# Altium PCB Z7_Lite.PcbDoc
Units mm, origin at the board's own origin, x right, y up, seen from the top; angles counter-clockwise.
Board outline 100 x 81 mm, 2 copper layers (Top Layer, Bottom Layer), stack 1.571 mm thick; 10 components, 66 nets, 221 pads, 192 vias.
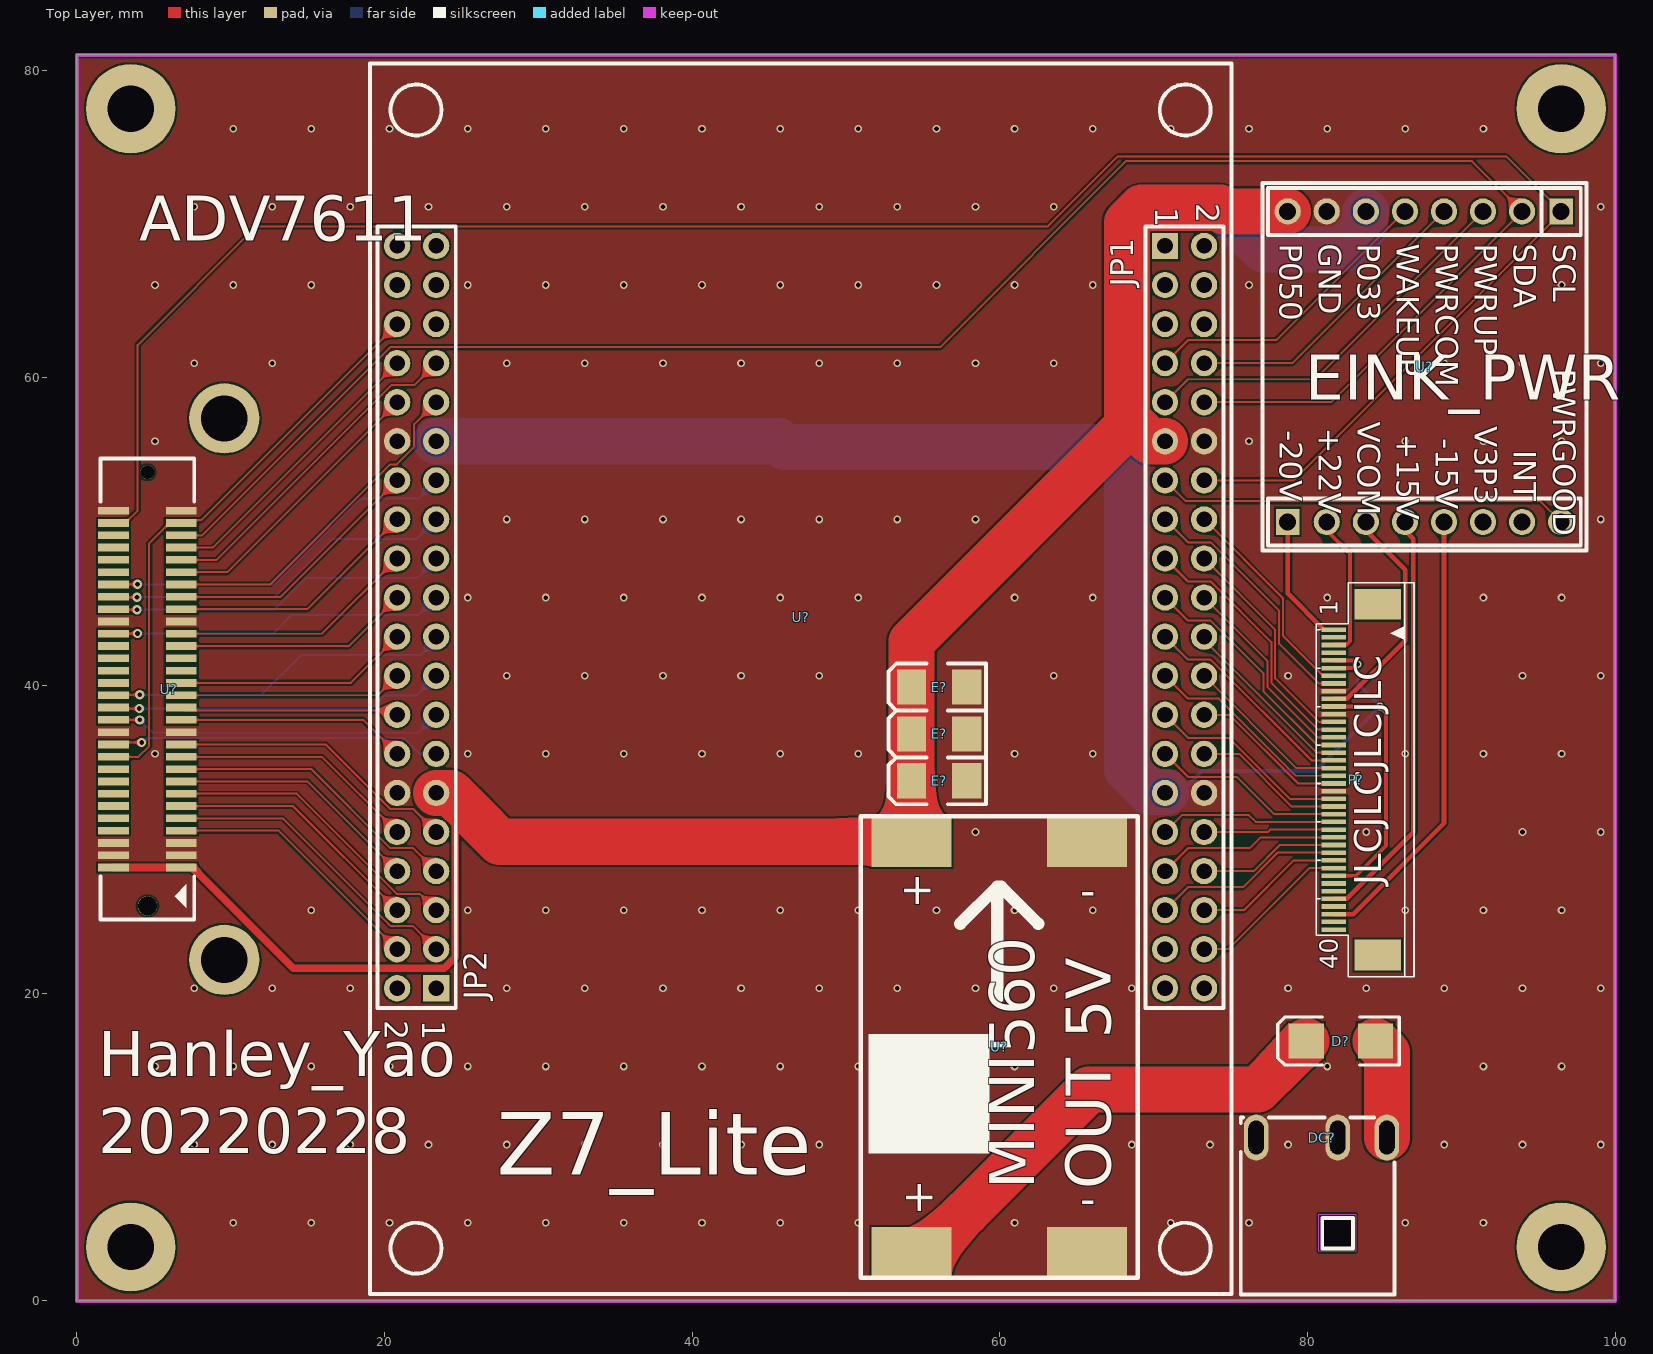
[diagram p0: Top Layer view]
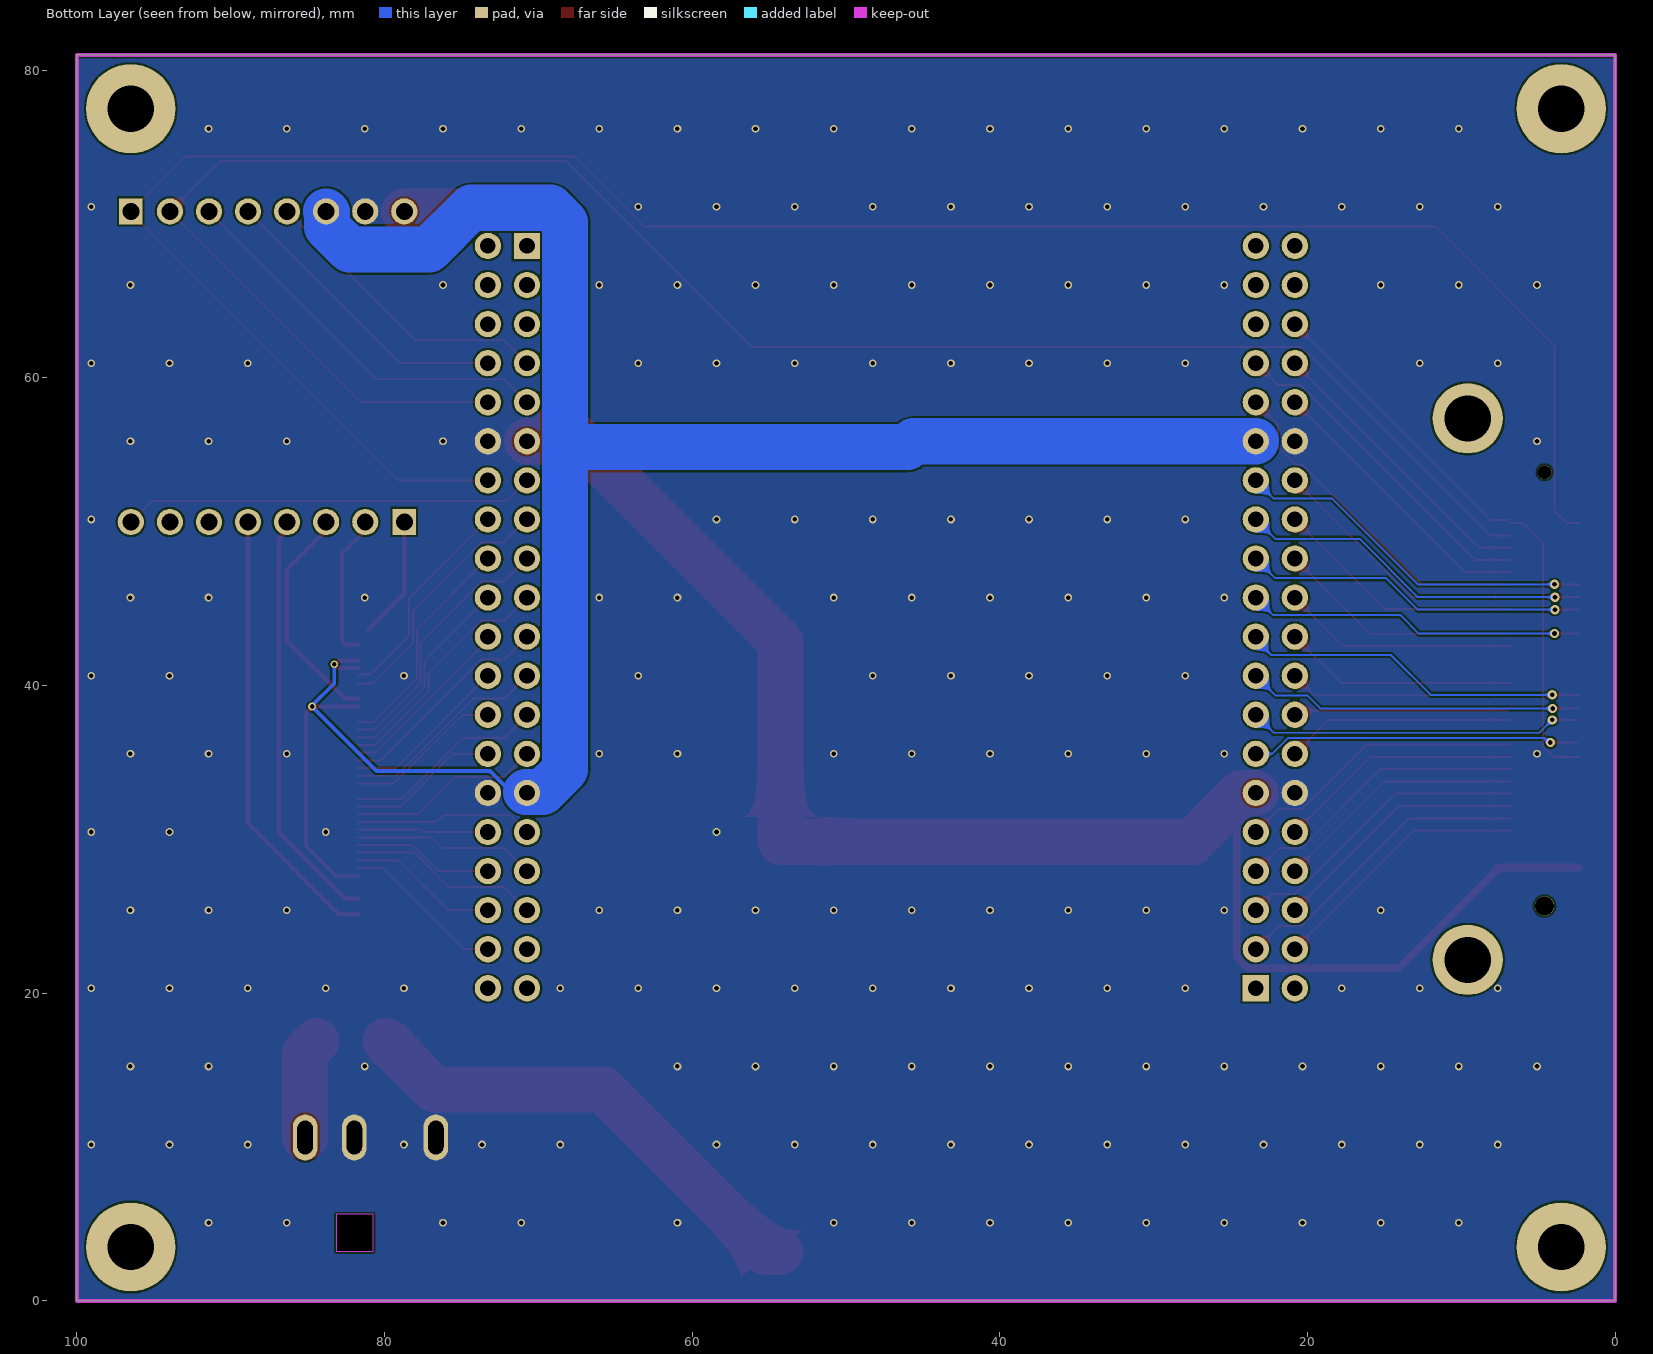
[diagram p1: Bottom Layer view, seen from below]

## Layer stack, top to bottom
Top Solder: solder mask 0.0102, Solder Resist, Dk 3.5
Top Layer: signal copper 0.0356
Dielectric 1: dielectric 1.5, c, Dk 4.8
Bottom Layer: signal copper 0.0356
Bottom Solder: solder mask 0.0102, Solder Resist, Dk 3.5

## Board outline
0,0 100,0 100,81 0,81

## Design rules (kind name [scope] priority, off if disabled: settings)
Clearance ADDR [InNetClass('ADDR') vs InNetClass('ADDR')] p1: gap=0.254 ignorepadtopadclearanceinfootprint=TRUE
Clearance [All] p2: gap=0.127 ignorepadtopadclearanceinfootprint=FALSE
ComponentClearance [All] p1: gap=0.254 collisioncheckmode=3 verticalgap=0.254 showdistances=FALSE donotcheckwithout3dbody=TRUE
HoleSize [All] p1: absolutevalues=TRUE maxlimit=10 minlimit=0.025 maxpercent=80.000 minpercent=20.000
MinimumSolderMaskSliver [All] p1: minsoldermaskwidth=0.127
PlaneConnect [All] p1: planeconnectstyle=Direct reliefexpansion=0.508 reliefentries=4 reliefconductorwidth=0.254 reliefairgap=0.254
PolygonConnect [All] p1: connectstyle=Direct reliefconductorwidth=0.254 reliefentries=4 polygonreliefangle="90 Angle" airgapwidth=0.254
RoutingVias [All] p1: holewidth=0.3 width=0.6 viastyle="Through Hole" minholewidth=0.3 minwidth=0.5 maxholewidth=6.3 maxwidth=6.5
SilkToSilkClearance [All] p1: silktosilkclearance=0.1
SilkToSolderMaskClearance [IsPad] p1: minsilkscreentomaskgap=0 clearancetoexposedcopper=TRUE
SolderMaskExpansion [All] p1: expansion=0.01 istentingtop=FALSE
UnRoutedNet [All] p1: checkbadconnections=TRUE
Width [All] p1: maxlimit=20 minlimit=0.127 preferedwidth=0.254
23 further rules are at their usual default settings.

## Classes and differential pairs
component class Z7_Lite: D? DC? E? P? U?

## Components (designator, comment, footprint, x,y, rotation, side; value= is the part's Value field where it differs from the comment)
D? "SS510" SMB 82.169,16.891 r180 top
DC? "DC-044-20A" DC-IN-TH_DC-044-20A 80.899,6.223 r0 top
E? "10uF/6.3V" C_3528 56.058,33.807 r0 top
E? "10uF/6.3V" C_3528 56.058,39.903 r0 top
E? "10uF/6.3V" C_3528 56.058,36.855 r0 top
P? "FPCCONNECTOR 40PIN 0.5MM" FPC-SMD_40P-P0.50_FG-H2.0-40P 83.744,33.884 r90 top
U? "TPS65185_MOD" TPS65185_MOD 87.605,60.731 r270 top
U? "FEP-HDMI7611-3V3" CONN-SMD_5177983-2 6.625,39.769 r90 top
U? "MINI560" MINI560 59.959,16.51 r90 top
U? "Z7_LITE" Z7_LITE 47.049,40.445 r0 top locked

## Footprints (in the part's own frame and the unit in brackets; to place one, negate y for a bottom-side part, rotate by r counter-clockwise, add the part's x,y. Pads: shape width x height; smd on the part's side, far side on the other; paste and mask are expansions set on the pad)
C_3528 [mil] "B型贴片钽电容 长3.5mm，宽2.8mm，厚1.9mm      [ PCB学习群514746572 ]"
  rect 75x90 smd: 1(-70.87,-0.01) 2(70.86,-0.01)
  silkscreen extent -130,-60 120,60, body extent -69,-55 69,55, height 76
CONN-SMD_5177983-2 [mm]
  rect 0.5x2 smd: 1(-11.599,-0.157) 2(-11.599,4.243) 3(-10.799,-0.157) 4(-10.799,4.243) 5(-10,-0.157) 6(-10,4.243) 7(-9.199,-0.157) 8(-9.199,4.243) 9(-8.4,-0.157) 10(-8.4,4.243) 11(-7.6,-0.157) 12(-7.6,4.243) 13(-6.799,-0.157) 14(-6.799,4.243) 15(-6,-0.157) 16(-6,4.243) 17(-5.199,-0.157) 18(-5.199,4.243) 19(-4.4,-0.157) 20(-4.4,4.243) 21(-3.6,-0.157) 22(-3.6,4.243) 23(-2.799,-0.157) 24(-2.799,4.243) 25(-2,-0.157) 26(-2,4.243) 27(-1.199,-0.157) 28(-1.199,4.243) 29(-0.4,-0.157) 30(-0.4,4.243) 31(0.4,-0.157) 32(0.4,4.243) 33(1.201,-0.157) 34(1.201,4.243) 35(2,-0.157) 36(2,4.243) 37(2.801,-0.157) 38(2.801,4.243) 39(3.6,-0.157) 40(3.6,4.243) 41(4.4,-0.157) 42(4.4,4.243) 43(5.201,-0.157) 44(5.201,4.243) 45(6,-0.157) 46(6,4.243) 47(6.801,-0.157) 48(6.801,4.243) 49(7.6,-0.157) 50(7.6,4.243) 51(8.4,-0.157) 52(8.4,4.243) 53(9.201,-0.157) 54(9.201,4.243) 55(10,-0.157) 56(10,4.243) 57(10.801,-0.157) 58(10.801,4.243) 59(11.6,-0.157) 60(11.6,4.243)
  round 4.57 hole 3: P1(17.6,-2.958) P2(-17.6,-2.958)
  round 1.25 hole 1.25 unplated: ""(-14.099,2.043)
  round 0.9 hole 0.9 unplated: ""(14.1,2.043)
  silkscreen extent -14.99,-1.01 14.99,5.09
DC-IN-TH_DC-044-20A [mm]
  oval 1.6x3 hole 1 slot 2.2 at 90 deg: 1(4.263,4.391) 2(-4.236,4.391) 3(1.064,4.391)
  Keep-Out Layer board cut-out: 2.244,-3.009 -0.156,-3.009 -0.156,-0.609 2.244,-0.609
  silkscreen extent -5.24,-5.81 4.76,5.69
FPC-SMD_40P-P0.50_FG-H2.0-40P [mm]
  rect 0.3x1.6 smd: 1(9.752,2.026) 2(9.252,2.026) 3(8.752,2.026) 4(8.252,2.026) 5(7.752,2.026) 6(7.252,2.026) 7(6.752,2.026) 8(6.252,2.026) 9(5.751,2.026) 10(5.252,2.026) 11(4.752,2.026) 12(4.252,2.026) 13(3.752,2.026) 14(3.252,2.026) 15(2.752,2.026) 16(2.252,2.026) 17(1.752,2.026) 18(1.252,2.026) 19(0.752,2.026) 20(0.252,2.026) 21(-0.248,2.026) 22(-0.748,2.026) 23(-1.248,2.026) 24(-1.748,2.026) 25(-2.248,2.026) 26(-2.748,2.026) 27(-3.248,2.026) 28(-3.748,2.026) 29(-4.248,2.026) 30(-4.748,2.026) 31(-5.248,2.026) 32(-5.748,2.026) 33(-6.248,2.026) 34(-6.748,2.026) 35(-7.248,2.026) 36(-7.748,2.026) 37(-8.248,2.026) 38(-8.748,2.026) 39(-9.248,2.026) 40(-9.748,2.026)
  rect 2x3 smd: 41(-11.398,-0.83) 42(11.398,-0.83)
  silkscreen extent -12.8,-3.18 12.8,3.18
MINI560 [mm]
  rect 3.25x5.2 smd: 1(-13.335,5.7) 2(-13.335,-5.7) 3(13.335,5.7) 4(13.335,-5.7)
  silkscreen extent -15,-9 15,9
SMB [mm] "DO-214-AA/SMB; 2 C-Bend Leads; Body 5.3 x 3.6 mm, inc. leads (LxW)"
  rect 2.3x2.3 smd: 1(-2.25,0) 2(2.25,0)
  silkscreen extent -3.8,-1.55 4.1,1.55
TPS65185_MOD [mm]
  rect 1.7x1.524 hole 1.1: 1(-10.097,8.89) 9(10.097,-8.89)
  round 1.7 hole 1.1: 2(-10.097,6.35) 3(-10.096,3.81) 4(-10.096,1.27) 5(-10.096,-1.27) 6(-10.096,-3.81) 7(-10.096,-6.35) 8(-10.096,-8.89) 10(10.097,-6.35) 11(10.096,-3.81) 12(10.096,-1.27) 13(10.096,1.27) 14(10.096,3.81) 15(10.096,6.35) 16(10.096,8.89)
  silkscreen extent -11.94,-10.54 11.94,10.54
Z7_LITE [mm]
  rect 1.71x1.71 hole 1.01: 1(23.69,28.135) 41(-23.69,-20.125)
  round 1.71 hole 1.01: 2(26.23,28.135) 3(23.69,25.595) 4(26.23,25.595) 5(23.69,23.055) 6(26.23,23.055) 7(23.69,20.515) 8(26.23,20.515) 9(23.69,17.975) 10(26.23,17.975) 11(23.69,15.435) 12(26.23,15.435) 13(23.69,12.895) 14(26.23,12.895) 15(23.69,10.355) 16(26.23,10.355) 17(23.69,7.815) 18(26.23,7.815) 19(23.69,5.275) 20(26.23,5.275) 21(23.69,2.735) 22(26.23,2.735) 23(23.69,0.195) 24(26.23,0.195) 25(23.69,-2.345) 26(26.23,-2.345) 27(23.69,-4.885) 28(26.23,-4.885) 29(23.69,-7.425) 30(26.23,-7.425) 31(23.69,-9.965) 32(26.23,-9.965) 33(23.69,-12.505) 34(26.23,-12.505) 35(23.69,-15.045) 36(26.23,-15.045) 37(23.69,-17.585) 38(26.23,-17.585) 39(23.69,-20.125) 40(26.23,-20.125) 42(-26.23,-20.125) 43(-23.69,-17.585) 44(-26.23,-17.585) 45(-23.69,-15.045) 46(-26.23,-15.045) 47(-23.69,-12.505) 48(-26.23,-12.505) 49(-23.69,-9.965) 50(-26.23,-9.965) 51(-23.69,-7.425) 52(-26.23,-7.425) 53(-23.69,-4.885) 54(-26.23,-4.885) 55(-23.69,-2.345) 56(-26.23,-2.345) 57(-23.69,0.195) 58(-26.23,0.195) 59(-23.69,2.735) 60(-26.23,2.735) 61(-23.69,5.275) 62(-26.23,5.275) 63(-23.69,7.815) 64(-26.23,7.815) 65(-23.69,10.355) 66(-26.23,10.355) 67(-23.69,12.895) 68(-26.23,12.895) 69(-23.69,15.435) 70(-26.23,15.435) 71(-23.69,17.975) 72(-26.23,17.975) 73(-23.69,20.515) 74(-26.23,20.515) 75(-23.69,23.055) 76(-26.23,23.055) 77(-23.69,25.595) 78(-26.23,25.595) 79(-23.69,28.135) 80(-26.23,28.135)
  silkscreen extent -28,-40 28,40

## Part data
D?: "肖特基二极管", 0.0_BOM名称=肖特基二极管, 0.1_属性=100V/5A, 1.库作者=冰凌猫, 2.库版本=v2.0_2021.03.30, 3.交流分享=Q群514746572,开源更新,欢迎一起交流学习PCB设计, 4.作者声明=旨为整合最全库集,欢迎转载,禁止商用！-冰凌猫, 5.备注说明=该库已二次整合过网上各热销库,基本最全,无需重复搜购安装
E? E? E?: library part CT, "贴片钽电容", 0.0_BOM名称=贴片钽电容, 1.库作者=冰凌猫, 2.库版本="v2.0 (2021.03.30)", 3.交流分享=Q群514746572,开源更新,欢迎一起交流学习PCB设计, 4.作者声明=旨为整合最全库集,欢迎转载,禁止商用！-冰凌猫, 5.备注说明=该库已二次整合过网上各热销库,基本最全,无需重复搜购安装

## Free pads (board coordinates)
  round 5.8 hole 3: 3(3.5,3.5) 3(3.5,77.5) 3(96.5,3.5) 3(96.5,77.5)

## Via types
v1: diameter 0.5, hole 0.3, Top Layer to Bottom Layer, tented both sides, 184 vias
v2: diameter 0.6, hole 0.3, Top Layer to Bottom Layer, tented both sides, 8 vias

## Nets (pads, with @x,y where several pads share a name; then routed paths per layer and width w, separated by ;. In a path a pad name is that pad's centre, name@x,y a point inside that pad or via, vN(x,y) a via of type N, cw(c..) or ccw(c..) an arc to the next point about the centre after c; other vN are vias at no path point)
+5: E?.1 U?.1@6.782,28.169 U?.2@2.382,28.169 U?.3@54.259,29.845 U?.8@78.715,70.828 U?.11@70.739,55.88 U?.51@23.359,33.02 | length 127.7
  Top Layer w0.5: U?.2@2.382,28.169 6.782,28.169 7.532,28.169 14.073,21.628 23.869,21.628 24.591,22.35 24.591,31.788 U?.51@23.359,33.02
  Top Layer w3: U?.51@23.359,33.02 24.329,33.02 25.841,31.508 25.841,31.487 27.483,29.845 54.259,29.845 54.259,39.902 54.258,39.903 54.258,42.853 67.897,56.493 ; U?.11@70.739,55.88 69.769,55.88 68.257,57.392 68.257,70.109 69.21,71.062 74.307,71.062 74.541,70.828 U?.8@78.715,70.828
CKV: P?.7 U?.16@73.279,50.8 | length 14.1
  Top Layer w0.127: U?.16@73.279,50.8 78.41,45.669 78.41,43.224 80.912,40.722 81.631,40.722 P?.7
D0: P?.14 U?.17@70.739,48.26 | length 17.1
  Top Layer w0.127: U?.17@70.739,48.26 72.233,46.766 73.712,46.766 77.648,42.83 77.648,40.187 80.699,37.135 P?.14
D1: P?.15 U?.20@73.279,45.72 | length 13.2
  Top Layer w0.127: U?.20@73.279,45.72 77.394,41.605 77.394,39.91 80.668,36.636 P?.15
D2: P?.16 U?.19@70.739,45.72 | length 15.6
  Top Layer w0.127: U?.19@70.739,45.72 72.233,44.226 73.712,44.226 77.14,40.798 77.14,39.623 80.627,36.135 P?.16
D3: P?.17 U?.22@73.279,43.18 | length 11.7
  Top Layer w0.127: U?.22@73.279,43.18 73.279,42.951 80.595,35.636 P?.17
D4: P?.18 U?.21@70.739,43.18 | length 14.3
  Top Layer w0.127: U?.21@70.739,43.18 72.233,41.686 73.712,41.686 80.262,35.135 P?.18
D5: P?.19 U?.24@73.279,40.64 | length 10.9
  Top Layer w0.127: U?.24@73.279,40.64 79.283,34.636 P?.19
D6: P?.20 U?.23@70.739,40.64 | length 13.7
  Top Layer w0.127: U?.23@70.739,40.64 72.233,39.146 74.235,39.146 79.245,34.135 P?.20
D7: P?.21 U?.26@73.279,38.1 | length 10.3
  Top Layer w0.127: U?.26@73.279,38.1 74.921,38.1 79.385,33.636 P?.21
D8: P?.23 U?.25@70.739,38.1 | length 13.2
  Top Layer w0.127: U?.25@70.739,38.1 72.233,36.606 74.88,36.606 78.85,32.636 P?.23
D9: P?.24 U?.28@73.279,35.56 | length 9.9
  Top Layer w0.127: U?.28@73.279,35.56 75.566,35.56 78.991,32.135 P?.24
D10: P?.25 U?.27@70.739,35.56 | length 12.6
  Top Layer w0.127: U?.27@70.739,35.56 72.233,34.066 75.397,34.066 77.827,31.636 P?.25
D11: P?.26 U?.31@70.739,30.48 | length 11.6
  Top Layer w0.127: U?.31@70.739,30.48 71.835,31.576 76.193,31.576 76.633,31.135 P?.26
D12: P?.27 U?.32@73.279,30.48 | length 8.5
  Top Layer w0.127: U?.32@73.279,30.48 77.418,30.48 77.574,30.636 P?.27
D13: P?.28 U?.33@70.739,27.94 | length 11.9
  Top Layer w0.127: U?.33@70.739,27.94 72.233,29.434 76.262,29.434 76.963,30.135 P?.28
D14: P?.29 U?.34@73.279,27.94 | length 9.1
  Top Layer w0.127: U?.34@73.279,27.94 76.496,27.94 78.192,29.636 P?.29
D15: P?.30 U?.35@70.739,25.4 | length 12.5
  Top Layer w0.127: U?.35@70.739,25.4 72.233,26.894 75.81,26.894 78.051,29.135 P?.30
FD0: U?.51@6.782,48.169 U?.73 | length 21.9
  Top Layer w0.127: U?.51@6.782,48.169 9.09,48.169 20.451,59.531 21.93,59.531 U?.73
FD1: U?.49@6.782,47.369 U?.72 | length 18.6
  Top Layer w0.127: U?.49@6.782,47.369 9.768,47.369 U?.72
FD2: U?.47@6.782,46.569 U?.71 | length 22.4
  Top Layer w0.127: U?.47@6.782,46.569 12.57,46.569 20.386,54.386 20.803,54.386 21.93,55.512 21.93,56.991 U?.71
FD3: U?.45@6.782,45.769 U?.68 | length 17.2
  Top Layer w0.127: U?.45@6.782,45.769 13.248,45.769 U?.68
FD4: U?.43@6.782,44.969 U?.66 | length 16.5
  Top Layer w0.127: U?.43@6.782,44.969 14.988,44.969 U?.66
FD5: U?.44@2.382,44.969 U?.63 | length 22.4
  Top Layer w0.127: U?.44@2.382,44.969 2.418,44.933 v2(3.912,44.933)
  Bottom Layer w0.127: v2(3.912,44.933) 12.834,44.933 14.892,46.99 22.089,46.99 U?.63
FD6: U?.40@2.382,43.369 U?.61 | length 22
  Top Layer w0.127: U?.40@2.382,43.369 2.396,43.383 v2(3.937,43.383)
  Bottom Layer w0.127: v2(3.937,43.383) 12.751,43.383 13.945,44.577 22.216,44.577 U?.61
FD7: U?.39@6.782,43.369 U?.64 | length 16.1
  Top Layer w0.127: U?.39@6.782,43.369 15.928,43.369 U?.64
FD8: U?.37@6.782,42.569 U?.62 | length 15.3
  Top Layer w0.127: U?.37@6.782,42.569 17.668,42.569 U?.62
FD9: U?.30@2.382,39.369 U?.59@23.359,43.18 | length 22.7
  Top Layer w0.127: U?.30@2.382,39.369 2.408,39.395 v2(4.089,39.395)
  Bottom Layer w0.127: v2(4.089,39.395) 11.989,39.395 14.58,41.986 22.352,41.986 23.359,42.993 U?.59@23.359,43.18
FD10: U?.31@6.782,40.169 U?.60@20.819,43.18 | length 15.3
  Top Layer w0.127: U?.31@6.782,40.169 17.808,40.169 U?.60@20.819,43.18
FD11: U?.28@2.382,38.569 U?.57@23.359,40.64 | length 21.9
  Top Layer w0.127: U?.28@2.382,38.569 2.444,38.506 v2(4.064,38.506)
  Bottom Layer w0.127: v2(4.064,38.506) 19.152,38.506 19.99,39.345 22.064,39.345 U?.57@23.359,40.64
FD12: U?.26@2.382,37.769 U?.55@23.359,38.1 | length 21.8
  Top Layer w0.127: U?.26@2.383,37.77 v2(4.089,37.77)
  Bottom Layer w0.127: v2(4.089,37.77) 4.928,36.931 22.191,36.931 U?.55@23.359,38.1
FD13: U?.22@2.382,36.169 U?.53@23.359,35.56 | length 21.6
  Top Layer w0.127: U?.22@2.382,36.169 2.513,36.301 v2(4.209,36.301)
  Bottom Layer w0.127: v2(4.209,36.301) 4.322,36.301 4.627,36.606 21.252,36.606 22.298,35.56 U?.53@23.359,35.56
FD14: U?.27@6.782,38.569 U?.56@20.819,38.1 | length 14.2
  Top Layer w0.127: U?.27@6.782,38.569 6.968,38.383 20.536,38.383 U?.56@20.819,38.1
FD15: U?.25@6.782,37.769 U?.54@20.819,35.56 | length 15
  Top Layer w0.127: U?.25@6.782,37.769 18.61,37.769 U?.54@20.819,35.56
FD16: U?.21@6.782,36.169 U?.49@23.359,30.48 | length 18.9
  Top Layer w0.127: U?.21@6.782,36.169 16.18,36.169 20.375,31.974 21.865,31.974 U?.49@23.359,30.48
FD17: U?.19@6.782,35.369 U?.50@20.819,30.48 | length 16.1
  Top Layer w0.127: U?.19@6.782,35.369 15.93,35.369 U?.50@20.819,30.48
FD18: U?.17@6.782,34.569 U?.47@23.359,27.94 | length 19.3
  Top Layer w0.127: U?.17@6.782,34.569 15.251,34.569 20.386,29.434 21.865,29.434 U?.47@23.359,27.94
FD19: U?.15@6.782,33.769 U?.48@20.819,27.94 | length 16.5
  Top Layer w0.127: U?.15@6.782,33.769 14.99,33.769 U?.48@20.819,27.94
FD20: U?.13@6.782,32.969 U?.45@23.359,25.4 | length 19.7
  Top Layer w0.127: U?.13@6.782,32.969 14.3,32.969 20.824,26.446 22.314,26.446 U?.45@23.359,25.4
FD21: U?.11@6.782,32.169 U?.46@20.819,25.4 | length 16.8
  Top Layer w0.127: U?.11@6.782,32.169 14.05,32.169 U?.46@20.819,25.4
FD22: U?.9@6.782,31.369 U?.43@23.359,22.86 | length 20.1
  Top Layer w0.127: U?.9@6.782,31.369 13.372,31.369 20.272,24.469 20.279,24.469 20.393,24.354 21.865,24.354 U?.43@23.359,22.86
FD23: U?.7@6.782,30.569 U?.44@20.819,22.86 | length 17.2
  Top Layer w0.127: U?.7@6.782,30.569 13.11,30.569 U?.44@20.819,22.86
FDE: U?.46@2.382,45.769 U?.65 | length 23.1
  Top Layer w0.127: U?.46@2.382,45.769 2.405,45.745 v2(3.912,45.745)
  Bottom Layer w0.127: v2(3.912,45.745) 12.827,45.745 16.612,49.53 22.089,49.53 U?.65
FHS: U?.53@6.782,48.969 U?.74 | length 19
  Top Layer w0.127: U?.53@6.782,48.969 8.828,48.969 U?.74
FPCLK: U?.29@6.782,39.369 U?.58@20.819,40.64 | length 14.6
  Top Layer w0.127: U?.29@6.782,39.369 19.548,39.369 U?.58@20.819,40.64
FVS: U?.48@2.382,46.569 U?.67 | length 23.8
  Top Layer w0.127: U?.48@2.382,46.569 2.396,46.584 v2(3.937,46.584)
  Bottom Layer w0.127: v2(3.937,46.584) 12.827,46.584 18.415,52.172 22.225,52.172 23.359,53.306 U?.67
GND: DC?.2 DC?.3 E?.2 P?.9 P?.12 P?.22 U?.2@65.659,3.175 U?.3@6.782,28.969 U?.4@2.382,28.969 U?.4@65.659,29.845 U?.5@6.782,29.769 U?.6@2.382,29.769 U?.7@81.255,70.828 U?.12@73.279,55.88 U?.23@6.782,36.969 U?.24@2.382,36.969 U?.30@73.279,33.02 U?.41@6.782,44.169 U?.42@2.382,44.169 U?.52@20.819,33.02 U?.59@6.782,51.369 U?.60@2.382,51.369 U?.70
  other v1: 10.16,5.08 15.24,5.08 20.32,5.08 25.4,5.08 30.48,5.08 35.56,5.08 40.64,5.08 45.72,5.08 50.8,5.08 60.96,5.08 71.12,5.08 76.2,5.08 86.36,5.08 91.44,5.08 7.62,10.16 12.7,10.16 17.78,10.16 22.86,10.16 27.94,10.16 33.02,10.16 38.1,10.16 43.18,10.16 48.26,10.16 53.34,10.16 58.42,10.16 68.58,10.16 73.66,10.16 78.74,10.16 88.9,10.16 93.98,10.16 99.06,10.16 5.08,15.24 10.16,15.24 15.24,15.24 20.32,15.24 25.4,15.24 30.48,15.24 35.56,15.24 40.64,15.24 45.72,15.24 50.8,15.24 55.88,15.24 60.96,15.24 81.28,15.24 91.44,15.24 96.52,15.24 7.62,20.32 12.7,20.32 17.78,20.32 27.94,20.32 33.02,20.32 38.1,20.32 43.18,20.32 48.26,20.32 53.34,20.32 58.42,20.32 63.5,20.32 68.58,20.32 78.74,20.32 83.82,20.32 88.9,20.32 93.98,20.32 99.06,20.32 15.24,25.4 25.4,25.4 30.48,25.4 35.56,25.4 40.64,25.4 45.72,25.4 50.8,25.4 55.88,25.4 60.96,25.4 66.04,25.4 86.36,25.4 91.44,25.4 96.52,25.4 58.42,30.48 83.82,30.48 93.98,30.48 99.06,30.48 5.08,35.56 25.4,35.56 30.48,35.56 35.56,35.56 40.64,35.56 45.72,35.56 50.8,35.56 60.96,35.56 66.04,35.56 86.36,35.56 91.44,35.56 96.52,35.56 27.94,40.64 33.02,40.64 38.1,40.64 43.18,40.64 48.26,40.64 63.5,40.64 78.74,40.64 93.98,40.64 99.06,40.64 25.4,45.72 30.48,45.72 35.56,45.72 40.64,45.72 45.72,45.72 50.8,45.72 60.96,45.72 66.04,45.72 81.28,45.72 91.44,45.72 96.52,45.72 27.94,50.8 33.02,50.8 38.1,50.8 43.18,50.8 48.26,50.8 53.34,50.8 58.42,50.8 99.06,50.8 5.08,55.88 76.2,55.88 86.36,55.88 91.44,55.88 96.52,55.88 7.62,60.96 12.7,60.96 27.94,60.96 33.02,60.96 38.1,60.96 43.18,60.96 48.26,60.96 53.34,60.96 58.42,60.96 63.5,60.96 88.9,60.96 93.98,60.96 99.06,60.96 5.08,66.04 10.16,66.04 15.24,66.04 25.4,66.04 30.48,66.04 35.56,66.04 40.64,66.04 45.72,66.04 50.8,66.04 55.88,66.04 60.96,66.04 66.04,66.04 76.2,66.04 96.52,66.04 7.62,71.12 12.7,71.12 17.78,71.12 22.86,71.12 27.94,71.12 33.02,71.12 38.1,71.12 43.18,71.12 48.26,71.12 53.34,71.12 58.42,71.12 63.5,71.12 99.06,71.12 10.16,76.2 15.24,76.2 20.32,76.2 25.4,76.2 30.48,76.2 35.56,76.2 40.64,76.2 45.72,76.2 50.8,76.2 55.88,76.2 60.96,76.2 66.04,76.2 71.12,76.2 76.2,76.2 81.28,76.2 86.36,76.2 91.44,76.2
IO_EN: U?.20@2.382,35.369 U?.57@6.782,50.569 U?.76 | length 37.8
  Top Layer w0.127: U?.20@2.382,35.369 4,35.369 4.699,36.068 4.699,49.236 6.032,50.569 6.782,50.569 6.968,50.756 8.075,50.756 U?.76
NetD?_1: D?.1 DC?.1 | length 6.6
  Top Layer w3: D?.1 85.162,16.148 DC?.1
NetD?_2: D?.2 U?.1@54.259,3.175 | length 31.3
  Top Layer w3: U?.1@54.259,3.175 55.234,3.175 65.8,13.741 76.769,13.741 D?.2
PWRCOM: U?.4@88.875,70.828 U?.8@73.279,60.96 | length 19.7
  Top Layer w0.127: U?.8@73.279,60.96 79.007,60.96 U?.4@88.875,70.828
PWRGOOD: U?.13@70.739,53.34 U?.16@96.495,50.635 | length 26.9
  Top Layer w0.127: U?.13@70.739,53.34 72.093,51.986 95.143,51.986 U?.16@96.495,50.635
PWRUP: U?.3@91.415,70.828 U?.9@70.739,58.42 | length 25.8
  Top Layer w0.127: U?.9@70.739,58.42 72.233,59.914 80.501,59.914 U?.3@91.415,70.828
SCL: U?.1@96.495,70.828 U?.14@73.279,53.34 U?.58@2.382,50.569 | length 142.3
  Top Layer w0.127: U?.58@2.382,50.569 3.132,50.569 3.941,51.379 3.941,62.133 11.659,69.85 63.119,69.85 67.666,74.397 92.926,74.397 95.708,71.614 95.796,71.614 96.495,70.916 96.495,70.828 96.495,70.74 79.095,53.34 U?.14@73.279,53.34
SDA: U?.2@93.955,70.828 U?.10@73.279,58.42 U?.55@6.782,49.769 | length 124.4
  Top Layer w0.127: U?.55@6.782,49.769 8.15,49.769 20.386,62.006 56.113,62.006 68.199,74.092 90.691,74.092 93.955,70.828 81.547,58.42 U?.10@73.279,58.42
SPV: P?.8 U?.15@70.739,50.8 | length 16.7
  Top Layer w0.127: U?.15@70.739,50.8 72.233,49.306 73.712,49.306 78.156,44.862 78.156,42.707 80.727,40.135 P?.8
VCC: P?.5 P?.6 P?.11 P?.33 U?.6@83.795,70.828 U?.29@70.739,33.02 U?.69 | length 141.8
  Top Layer w0.254: P?.33 83.15,27.636 85.101,29.587 85.101,38.22 84.71,38.611 v1(84.71,38.636) P?.11 ; P?.6 82.987,41.135 83.241,41.389 v1(83.27,41.389) 83.204,41.389 82.957,41.636 P?.5
  Bottom Layer w0.254: U?.29@70.739,33.02 70.797,33.078 71.003,33.284 71.975,33.284 73.142,34.451 80.526,34.451 v1(84.71,38.636) 84.71,38.696 83.27,40.136 v1(83.27,41.389)
  Bottom Layer w3: U?.69 45.618,55.88 45.999,55.499 68.257,55.499 ; U?.29@70.797,33.078 69.711,33.078 68.257,34.532 68.257,55.499 ; U?.6@83.795,70.828 83.732,70.765 83.732,69.802 82.281,68.351 77.101,68.351 74.39,71.062 69.21,71.062 68.257,70.109 68.257,55.499
VCOM_EINK: P?.10 U?.11@83.795,50.635 | length 15
  Top Layer w0.3: P?.10 82.56,39.135 86.351,42.926 86.351,47.538 83.795,50.095 U?.11@83.795,50.635
VNEG_-15V: P?.38 U?.13@88.875,50.635 | length 29.2
  Top Layer w0.3: P?.38 82.968,25.135 88.875,31.042 U?.13@88.875,50.635
VNEG_-20V: P?.1 U?.9@78.715,50.635 | length 8
  Top Layer w0.3: U?.9@78.715,50.635 78.715,45.989 P?.1@81.068,43.636
VPOS_+15V: P?.36 U?.12@86.335,50.635 | length 27.4
  Top Layer w0.3: P?.36 82.559,26.135 86.887,30.463 86.887,49.542 86.335,50.095 U?.12@86.335,50.635
VPOS_+22V: P?.3 U?.10@81.255,50.635 | length 9.5
  Top Layer w0.254: U?.10@81.255,50.635 81.255,50.092 82.772,48.575 82.772,42.88 82.55,42.659 81.741,42.659 P?.3
WAKEUP: U?.5@86.335,70.828 U?.7@70.739,60.96 | length 19.7
  Top Layer w0.127: U?.7@70.739,60.96 72.233,62.454 77.961,62.454 U?.5@86.335,70.828
XCL: P?.13 U?.18@73.279,48.26 | length 14.7
  Top Layer w0.127: U?.18@73.279,48.26 77.902,43.637 77.902,40.461 80.727,37.636 P?.13
XLE: P?.32 U?.38@73.279,22.86 | length 10.6
  Top Layer w0.127: U?.38@73.279,22.86 74.855,22.86 80.13,28.135 P?.32
XSTL: P?.31 U?.36@73.279,25.4 | length 9.8
  Top Layer w0.127: U?.36@73.279,25.4 75.875,25.4 79.11,28.636 P?.31
pads on no net: P?.2 P?.4 P?.34 P?.35 P?.37 P?.39 P?.40 P?.41 P?.42 U?. U?.1@70.739,68.58 U?.2@73.279,68.58 U?.3@70.739,66.04 U?.4@73.279,66.04 U?.5@70.739,63.5 U?.6@73.279,63.5 U?.8@2.382,30.569 U?.10@2.382,31.369 U?.12@2.382,32.169 U?.14@2.382,32.969 U?.14@91.415,50.635 U?.15@93.955,50.635 U?.16@2.382,33.769 U?.18@2.382,34.569 U?.32@2.382,40.169 U?.33@6.782,40.969 U?.34@2.382,40.969 U?.35@6.782,41.769 U?.36@2.382,41.769 U?.37@70.739,22.86 U?.38@2.382,42.569 U?.39@70.739,20.32 U?.40@73.279,20.32 U?.41@23.359,20.32 U?.42@20.819,20.32 U?.50@2.382,47.369 U?.52@2.382,48.169 U?.54@2.382,48.969 U?.56@2.382,49.769 U?.75 U?.77 U?.78 U?.79 U?.80 U?.P1 U?.P2

## Polygon pours and split planes (outlines as drawn)
GND on Top Layer "GND_L01_P008" (solid, pour order 8): 0,0 100,0 100,81 0,81
GND on Bottom Layer "GND_L02_P009" (solid, pour order 9): 0,0 100,0 100,81 0,81

## Keep-outs
Keep-Out Layer:
  the board outline again, w0.254

## Silkscreen, mask and mechanical layers (free items; w line width, h text height)
Top Overlay:
  text "ADV7611" at 4.064,67.945 h5
  text "EINK_PWR" at 79.858,57.607 h5
  text "JLCJLCJLCJLC" at 85.395,27.026 h3 r90
  text "Hanley_Yao / 20220228" at 1.397,8.636 h5
  text "MINI560 / OUT 5V" at 68.199,7.239 h5 r90
  text "Z7_Lite" at 27.305,6.858 h7
Mechanical 1:
  lines w0.1: 0,0 0,81 100,81 100,0 0,0 ; 80.743,3.214 80.743,5.614 83.143,5.614 83.143,3.214 80.743,3.214

## Text inside footprints (layer, text, board x,y; h text height)
P?: Top Overlay "40" at 82.366,21.565 h2 r90; Top Overlay "1" at 82.347,44.552 h2 r90
U?: Top Overlay "SCL" at 95.479,68.732 h2.5 r270; Top Overlay "SDA" at 92.939,68.732 h2.5 r270; Top Overlay "PWRUP" at 90.399,68.732 h2.5 r270; Top Overlay "PWRCOM" at 87.859,68.732 h2.5 r270; Top Overlay "WAKEUP" at 85.319,68.732 h2.5 r270; Top Overlay "P033" at 82.779,68.732 h2.5 r270; Top Overlay "GND" at 80.239,68.732 h2.5 r270; Top Overlay "P050" at 77.699,68.732 h2.5 r270; Top Overlay "-20V" at 77.699,56.599 h2.5 r270; Top Overlay "+22V" at 80.239,56.774 h2.5 r270; Top Overlay "VCOM" at 82.779,57.15 h2.5 r270; Top Overlay "+15V" at 85.319,56.36 h2.5 r270; Top Overlay "-15V" at 87.859,56.076 h2.5 r270; Top Overlay "V3P3" at 90.399,56.873 h2.5 r270; Top Overlay "INT" at 92.939,55.303 h2.5 r270; Top Overlay "PWRGOOD" at 95.479,60.604 h2.5 r270
U?: Top Overlay "1" at 22.442,18.238 h1.5 r270; Top Overlay "2" at 20.003,18.238 h1.5 r270; Top Overlay "JP2" at 26.653,19.567 h1.5 r90; Top Overlay "1" at 70.112,71.103 h1.5 r270; Top Overlay "2" at 72.779,71.357 h1.5 r270; Top Overlay "JP1" at 68.69,65.922 h1.5 r90
U?: Top Overlay "-" at 66.233,27.228 h2.03 r180; Top Overlay "-" at 66.233,7.162 h2.03 r180; Top Overlay "+" at 55.522,25.476 h2.03 r90; Top Overlay "+" at 55.65,5.538 h2.03 r90